# EAGLE board schema_TP_meteo (EAGLE 9.7.0)

Size 214.93 x 141.46 mm. Coordinates in mm from the lower left corner, seen from the top.
Outline: 0,0 214.93,0 214.93,141.46 0,141.46 0,0
Copper layers (1*16): Top 0.035mm / dielectric 1.5mm / Bottom 0.035mm
Design rules "default": minimum track width 6mil, minimum drill 0.35mm, track to track 6mil, track to pad 6mil, pad to pad 6mil, via to via 6mil, smd to smd 6mil, copper to edge 40mil, drill to drill 6mil, minimum pad ring 10mil, minimum via ring 8mil, stop-mask expansion 4mil, vias tented up to drill 0mil, thermal gap 10mil

## Footprints (pad centres in the part's own frame; a part is rotated, then mirrored left to right if it is on the bottom)
RESAD1016W63L850D250B = drill 0.83 pad 1.43: 1 -5.08,0; 2 5.08,0
SEN-13322 = drill 1.016 long: 1 -2.54,0; 2 0,0; 3 2.54,0
ARDUINO-UNO-R3-SHIELD = drill 1.016 pad 1.88: 3.3V 24.13,-2.54; 5V 24.13,0; A0 24.13,12.7; A1 24.13,15.24; A2 24.13,17.78; A3 24.13,20.32; A4 24.13,22.86; A5 24.13,25.4; AREF -24.13,-13.97; D2 -24.13,20.32; D3 -24.13,17.78; D4 -24.13,15.24; D5 -24.13,12.7; D6 -24.13,10.16; D7 -24.13,7.62; D8 -24.13,3.81; D9 -24.13,1.27; D10 -24.13,-1.27; D11 -24.13,-3.81; D12 -24.13,-6.35; D13 -24.13,-8.89; GND@0 24.13,2.54; GND@1 24.13,5.08; GND@2 -24.13,-11.43; IOREF 24.13,-7.62; NC 24.13,-10.16; RES 24.13,-5.08; RX -24.13,25.4; SCL -24.13,-19.05; SDA -24.13,-16.51; TX -24.13,22.86; VIN 24.13,7.62
LCD-I2C = drill 1.016 long: 1 -19.05,-5.08; 2 -19.05,-7.62; 3 -19.05,-10.16; 4 -19.05,-12.7
TO92 = drill 0.813 octagon: 1 -1.27,0; 2 0,1.905; 3 1.27,0

## Placement (x,y rotation side)
R1  1k  [RESAD1016W63L850D250B]  88.86,36.89 90 top
R2  1k  [RESAD1016W63L850D250B]  93.94,36.89 90 top
SEN1  SEN-13322  [SEN-13322]  10.79,47.12 0 top
U1  ARDUINO-UNO-R3-SHIELD  [ARDUINO-UNO-R3-SHIELD]  47.88,111.62 270 top
U2  LCD-16X2-I2CSUNFOUNDER-IIC  [LCD-I2C]  159.3,36.63 0 top
U3  TMP36GT9Z_TO92  [TO92]  128.78,57.13 270 top

## Library data of the parts
R1 R2 SEN1 U1-U3 = Tinkercad

## Nets
U1_3.3V: SEN1.1 U1.3.3V
U1_5V: U1.5V U2.2 U3.3
U1_A0: U1.A0 U3.2
U1_A1: SEN1.3 U1.A1
U1_A4: R2.2 U1.A4
U1_A5: R1.2 U1.A5
U1_GND: SEN1.2 U1.GND@0 U1.GND@1 U1.GND@2 U2.1
U2_SCL: R1.1 U2.4
U2_SDA: R2.1 U2.3

## Tracks (layer width: path | path; a pad name or v marks a point on that pad's centre or on a via)
U1_3.3V  (1 unrouted)
U1_5V  (2 unrouted)
U1_A0  (1 unrouted)
U1_A1  (1 unrouted)
U1_A4  (1 unrouted)
U1_A5  (1 unrouted)
U1_GND  (4 unrouted)
U2_SCL  (1 unrouted)
U2_SDA  (1 unrouted)